# EAGLE board usb_key (EAGLE 6.2)
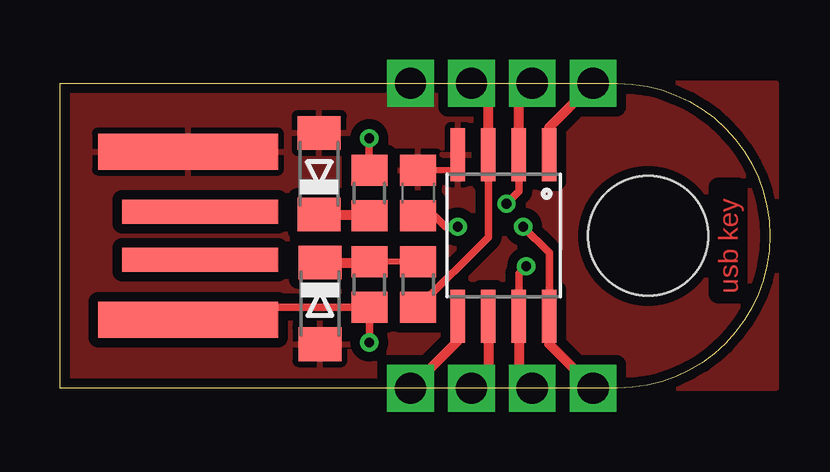
[diagram p0: board, top side]
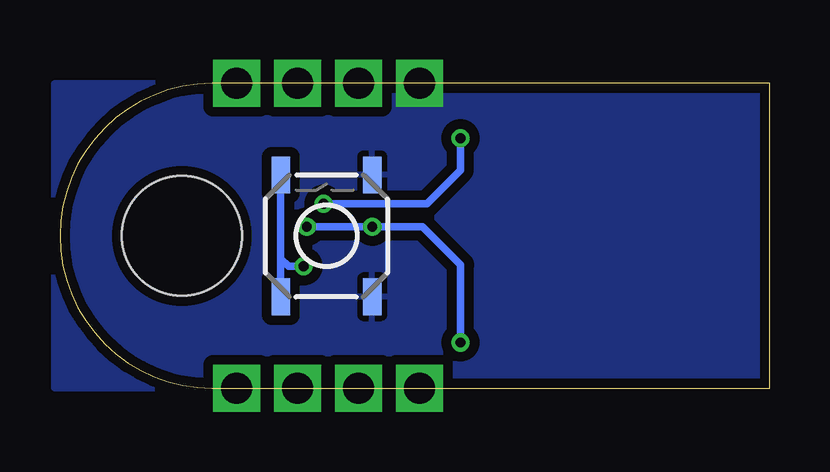
[diagram p1: board, bottom side, seen from below]

Size 29.6 x 12.7 mm. Coordinates in mm from the lower left corner, seen from the top.
Outline: 0,0 0,12.7 23.25,12.7 arc-180 23.25,0 0,0
Copper layers (1*16): Top 0.0356mm / dielectric 1.5011mm / Bottom 0.0356mm
Design rules: minimum track width 6mil, minimum drill 13mil, track to track 6mil, track to pad 6mil, pad to pad 6mil, via to via 6mil, smd to smd 6mil, copper to edge 15mil, drill to drill 6mil, minimum pad ring 7mil, minimum via ring 7mil, stop-mask expansion 4mil, vias tented up to drill 20mil, thermal gap 10mil
Holes 5 mm at 24.52,6.35

## Footprints (pad centres in the part's own frame; a part is rotated, then mirrored left to right if it is on the bottom)
C0805 = smd 1.3 x 1.5: 1 -0.95,0; 2 0.95,0
MINIMELF = smd 1.4 x 1.8: A 1.7,0; C -1.7,0
R0805 = smd 1.3 x 1.5: 1 -0.95,0; 2 0.95,0
TACTILE_SWITCH_SMD = smd 1.524 x 0.762: 1 -2.54,1.905; 2 2.54,1.905; 3 -2.54,-1.905; 4 2.54,-1.905
SO08-EIAJ = smd 0.61 x 2.21: 1 -1.905,-3.378; 2 -0.635,-3.378; 3 0.635,-3.378; 4 1.905,-3.378; 5 1.905,3.353; 6 0.635,3.353; 7 -0.635,3.353; 8 -1.905,3.353
USB-A-PCB = smd 7.5 x 1.5: 5V -0.2,-3.5; GND -0.2,3.5 | smd 6.5 x 1: USB_M 0.3,-1; USB_P 0.3,1

## Placement (x,y rotation side)
C1  0.1  [C0805]  14.94,8.13 90 top
D1  3v6  [MINIMELF]  10.81,8.94 90 top
D2  3v6  [MINIMELF]  10.84,3.53 270 top
R1  68  [R0805]  14.94,4.32 90 top
R2  1.5k  [R0805]  12.9,4.32 270 top
R3  68  [R0805]  12.9,8.13 270 top
S1  [TACTILE_SWITCH_SMD]  18.48,6.35 90 bottom
U1  ATTINY45/85  [SO08-EIAJ]  18.49,6.35 180 top
X1  USBPCB  [USB-A-PCB]  5.54,6.35 0 top

## Library data of the parts
C1 R1-R3 = rcl
D1 D2 = diode
S1 U1 X1 = SparkFun

## Nets
+5V: C1.1 R2.2 U1.8 X1.5V
D+: D1.C R3.2
D-: D2.C R1.2 R2.1
GND: C1.2 D1.A D2.A S1.3 S1.4 U1.4 X1.GND
MISO: U1.6
MOSI: U1.5
N$1: X1.USB_M
N$2: X1.USB_P
PB3: R3.1 U1.2
PB4: R1.1 U1.3
RST: U1.1
SCK: S1.1 S1.2 U1.7

## Tracks (layer width: path | path; a pad name or v marks a point on that pad's centre or on a via)
+5V  (via drill 0.41, 1.3)
  Top 0.305: X1.5V 8.32,2.85 8.84,3.37 R2.2 v12.9,1.91 | U1.8 20.4,5.64 v19.31,6.73 | C1.1 15.62,7.18 16.07,6.73 v16.58,6.73
  Top 0.406: U1.8 20.4,1.83 v22.23,0
  Bottom 0.305: v12.9,1.91 12.9,5.14 14.49,6.73 v16.58,6.73 16.71,6.73 v19.31,6.73
D+
  Top 0.254: R3.2 12.66,6.94
  Top 0.406: 10.75,7.35 D1.C 12.85,7.24 R3.2 12.61,7.48
D-
  Top 0.254: 12.64,5 R2.1 R1.2
  Top 0.406: 10.85,5.35 D2.C 12.86,5.23 R2.1 12.7,5.48
GND  (via drill 1.3)
  Top 0.254: D1.A 11.56,10.34 11.56,10.37 | C1.2 16.35,9.08 16.4,9.03 16.4,9.54 U1.4
  other vias: 14.61,12.7
  pour Bottom (isolate 0.406): 0,12.7 29.85,12.7 29.85,0 0,0
  pour Top (isolate 0.406): 0.01,12.7 29.85,12.7 29.85,0 0.01,0
MISO  (via drill 1.3 pad 0.2)
  Top 0.254: U1.6
  Top 0.406: U1.6 17.86,0.71 v17.15,0
MOSI  (via drill 1.3)
  Top 0.406: U1.5 16.59,1.98 v14.61,0
PB3  (via drill 0.41, 1.3)
  Top 0.305: v12.9,10.41 R3.1 | U1.2 19.13,8.2 v18.61,7.68
  Top 0.406: U1.2 19.13,12.14 v19.69,12.7
  Bottom 0.305: v12.9,10.41 v12.9,10.4 R3.1 14.3,7.68 v18.61,7.68
PB4  (via drill 1.3)
  Top 0.254: U1.3
  Top 0.305: R1.1 17.86,6.29 U1.3
  Top 0.406: U1.3 17.86,11.99 v17.15,12.7
RST  (via drill 1.3)
  Top 0.406: U1.1 20.4,10.87 v22.23,12.7
SCK  (via drill 0.41, 1.3 pad 0.2)
  Top 0.305: U1.7 19.13,4.77 v19.44,5.08
  Top 0.406: U1.7 19.13,0.56 v19.69,0
  Bottom 0.305: S1.2 20.39,5.4 | 20.39,5.4 S1.1 | v19.44,5.08 20.07,5.08 20.39,5.4

## Text on the board
Top: usb key
tStop: usb key